# Altium PCB gamePadRL2.PcbDoc
Units mm, origin at the board's own origin, x right, y up, seen from the top; angles counter-clockwise.
Board outline 28.2 x 20.6 mm, 2 copper layers (Top Layer, Bottom Layer); 3 components, 0 nets, 7 pads, 0 vias.
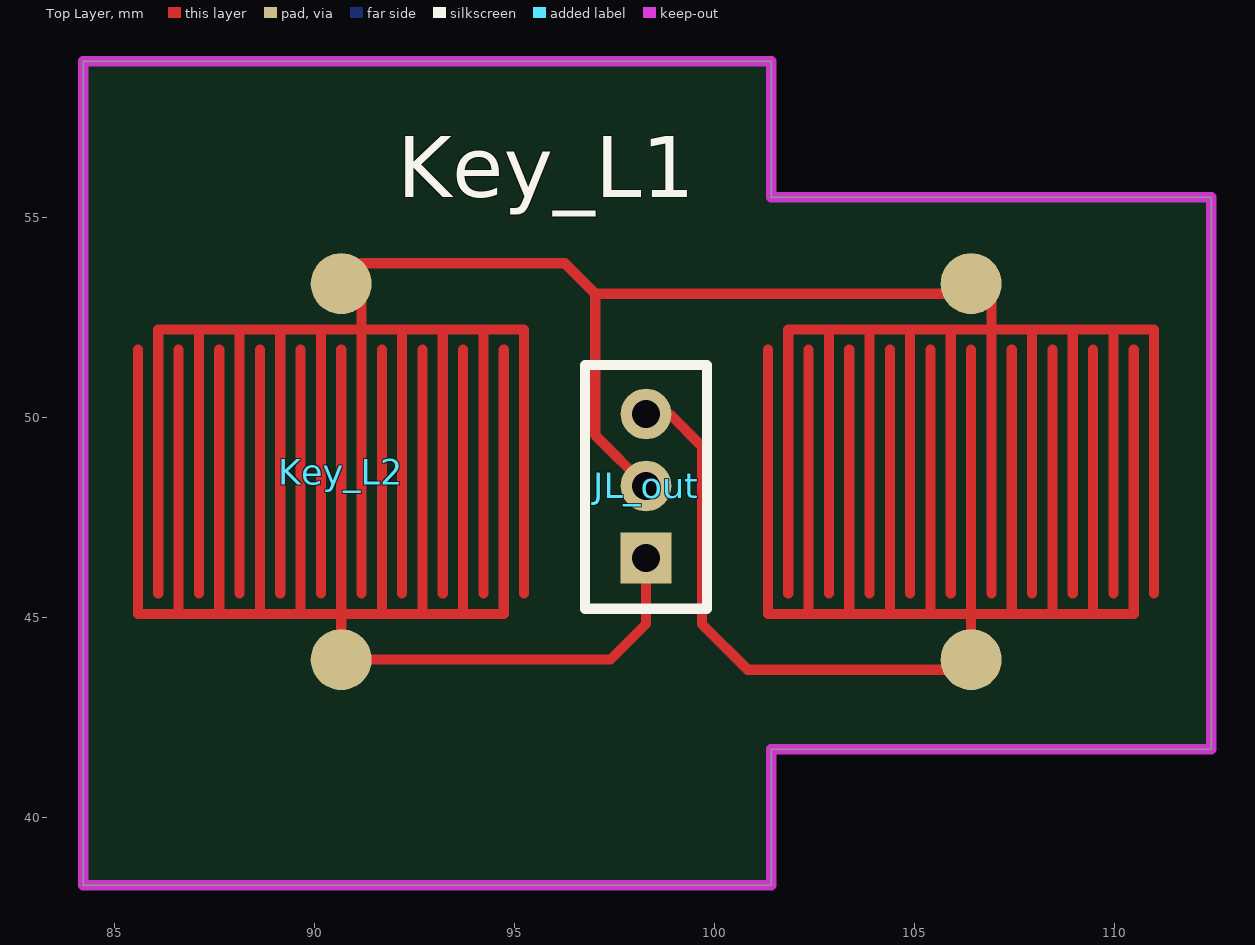
[diagram p0: Top Layer view]
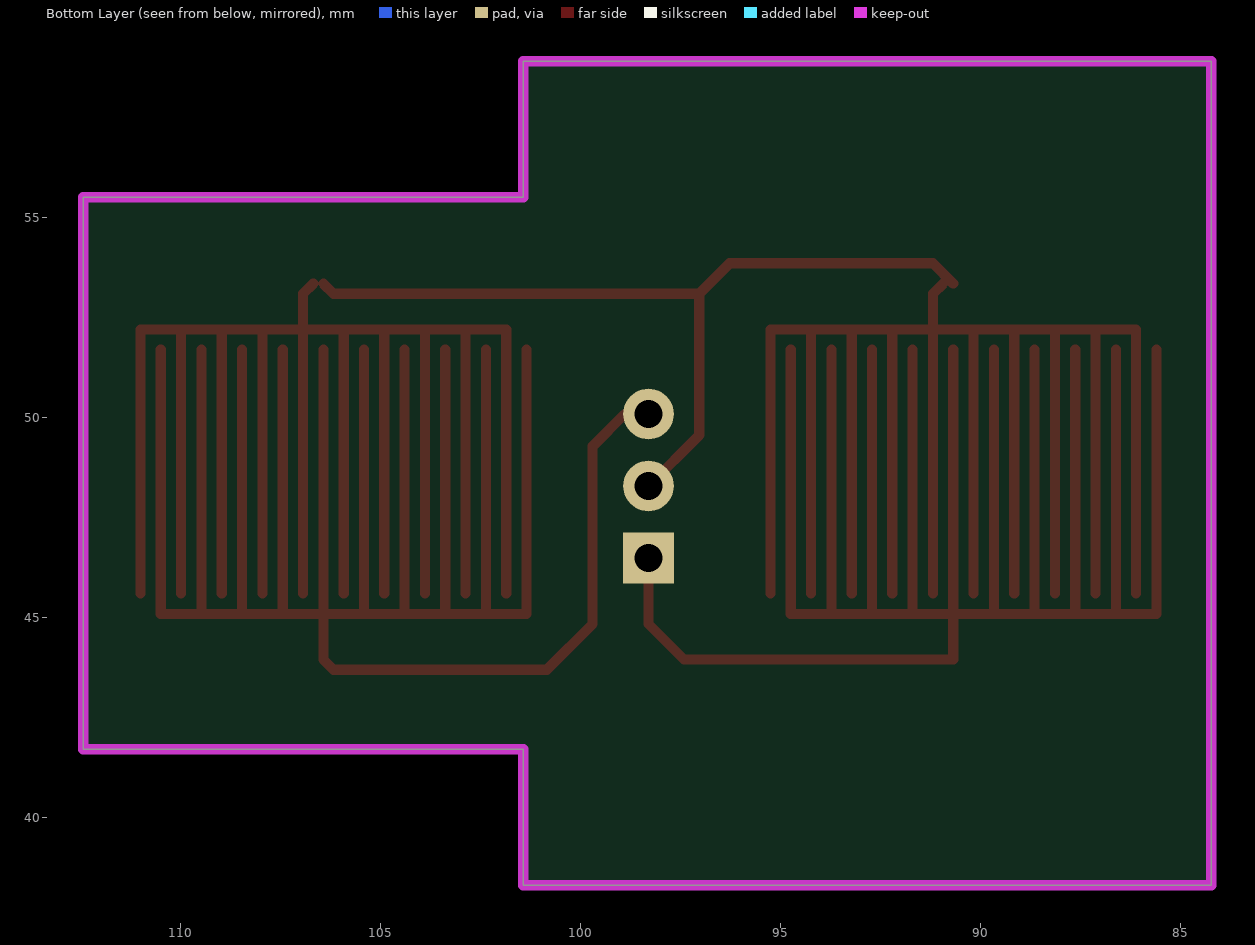
[diagram p1: Bottom Layer view, seen from below]

## Layer stack, top to bottom
Top Layer: signal copper 0.0356
Dielectric: dielectric 0.32, FR-4, Dk 4.8
Bottom Layer: signal copper 0.0356

## Board outline
84.229,38.3 84.229,58.9 101.429,58.9 101.429,55.5 112.429,55.5 112.429,41.7 101.429,41.7 101.429,38.3

## Design rules (kind name [scope] priority, off if disabled: settings)
Clearance [All] p1: gap=0.254
PolygonConnect [All] p1: connectstyle=Relief reliefconductorwidth=0.254 reliefentries=4 polygonreliefangle="90 Angle"
RoutingVias [All] p1: holewidth=0.711 width=1.27 viastyle="Through Hole" minholewidth=0.711 minwidth=1.27 maxholewidth=0.711 maxwidth=1.27
SilkscreenOverComponentPads [All] p1: minsilkscreentomaskgap=0.254
SolderMaskExpansion [All] p1: expansion=0.102
Width [All] p1: maxlimit=0.254 minlimit=0.254 preferedwidth=0.254
27 further rules are at their usual default settings.

## Components (designator, comment, footprint, x,y, rotation, side; value= is the part's Value field where it differs from the comment)
JL_out "CONJ-3" SIP-3 98.298,46.482 r180 top
Key_L1 "SW-PB" GAMEPADBIG 106.426,49.022 r90 top
Key_L2 "SW-PB" GAMEPADBIG 90.678,49.022 r90 top

## Footprints (in the part's own frame and the unit in brackets; to place one, negate y for a bottom-side part, rotate by r counter-clockwise, add the part's x,y. Pads: shape width x height; smd on the part's side, far side on the other; paste and mask are expansions set on the pad)
GAMEPADBIG [mil] "game pad"
  round 60 smd: 1(-200,0) 2(170,0)
  Top Layer lines w10: 105,200 -155,200 -155,160 ; -135,180 125,180 125,140 ; 105,160 -155,160 ; -135,140 125,140 ; 105,120 -155,120 ; -135,100 125,100 ; 105,80 -90,80 -155,80 -155,0 -155,-40 ; -155,70 -155,120 ; -135,60 125,60 125,-15 ; 125,50 125,100 ; -155,40 105,40 ; -135,20 120,20 ; -200,0 -165,0 105,0 ; 125,0 125,-60 ; 170,-10 160,-20 125,-20 125,-35 ; -135,-20 120,-20 ; 105,-40 -155,-40 ; -135,-60 125,-60 ; -155,-80 105,-80 ; -135,-100 125,-100 ; 105,-120 -155,-120 ; -135,-140 125,-140 ; 105,-160 -155,-160 -155,-120 ; -135,-180 125,-180 125,-140 ; -155,160 -155,120 ; 125,140 125,100 ; -155,-40 -155,-120 ; 125,-60 125,-100 ; 125,-100 125,-140
SIP-3 [mm] "sip-3"
  rect 1.27x1.27 hole 0.7: 1(0,0)
  round 1.27 hole 0.7: 2(0,-1.8) 3(0,-3.6)
  silkscreen extent -1.52,-4.83 1.52,1.27

## Part data
Key_L1 Key_L2: "Switch"

## Nets (pads, with @x,y where several pads share a name; then routed paths per layer and width w, separated by ;. In a path a pad name is that pad's centre, name@x,y a point inside that pad or via, vN(x,y) a via of type N, cw(c..) or ccw(c..) an arc to the next point about the centre after c; other vN are vias at no path point)
pads on no net: JL_out.1 JL_out.2 JL_out.3 Key_L1.1 Key_L1.2 Key_L2.1 Key_L2.2
copper on no net: | length 44.8
  Top Layer w0.254: 90.678,43.942 97.409,43.942 98.298,44.831 98.298,46.482 ; 90.678,53.34 91.186,53.848 96.266,53.848 97.028,53.086 ; 98.298,48.282 97.028,49.552 97.028,53.086 ; 98.298,50.082 98.889,50.082 99.695,49.276 99.695,44.831 100.838,43.688 106.172,43.688 106.426,43.942 ; 106.426,53.34 106.172,53.086 97.028,53.086

## Keep-outs
Keep-Out Layer:
  the board outline again, w0.254